# Altium PCB T-Type Converter.PcbDoc (part 3 of 4)
Units mil, origin at the board's own origin, x right, y up, seen from the top; angles counter-clockwise.
Board outline 14649.61 x 8960.63 mil, 2 copper layers (Top Layer, Bottom Layer), stack 64.8 mil thick; 214 components, 130 nets, 860 pads, 57 vias.
Unrouted connection lines stored in the file: 20.
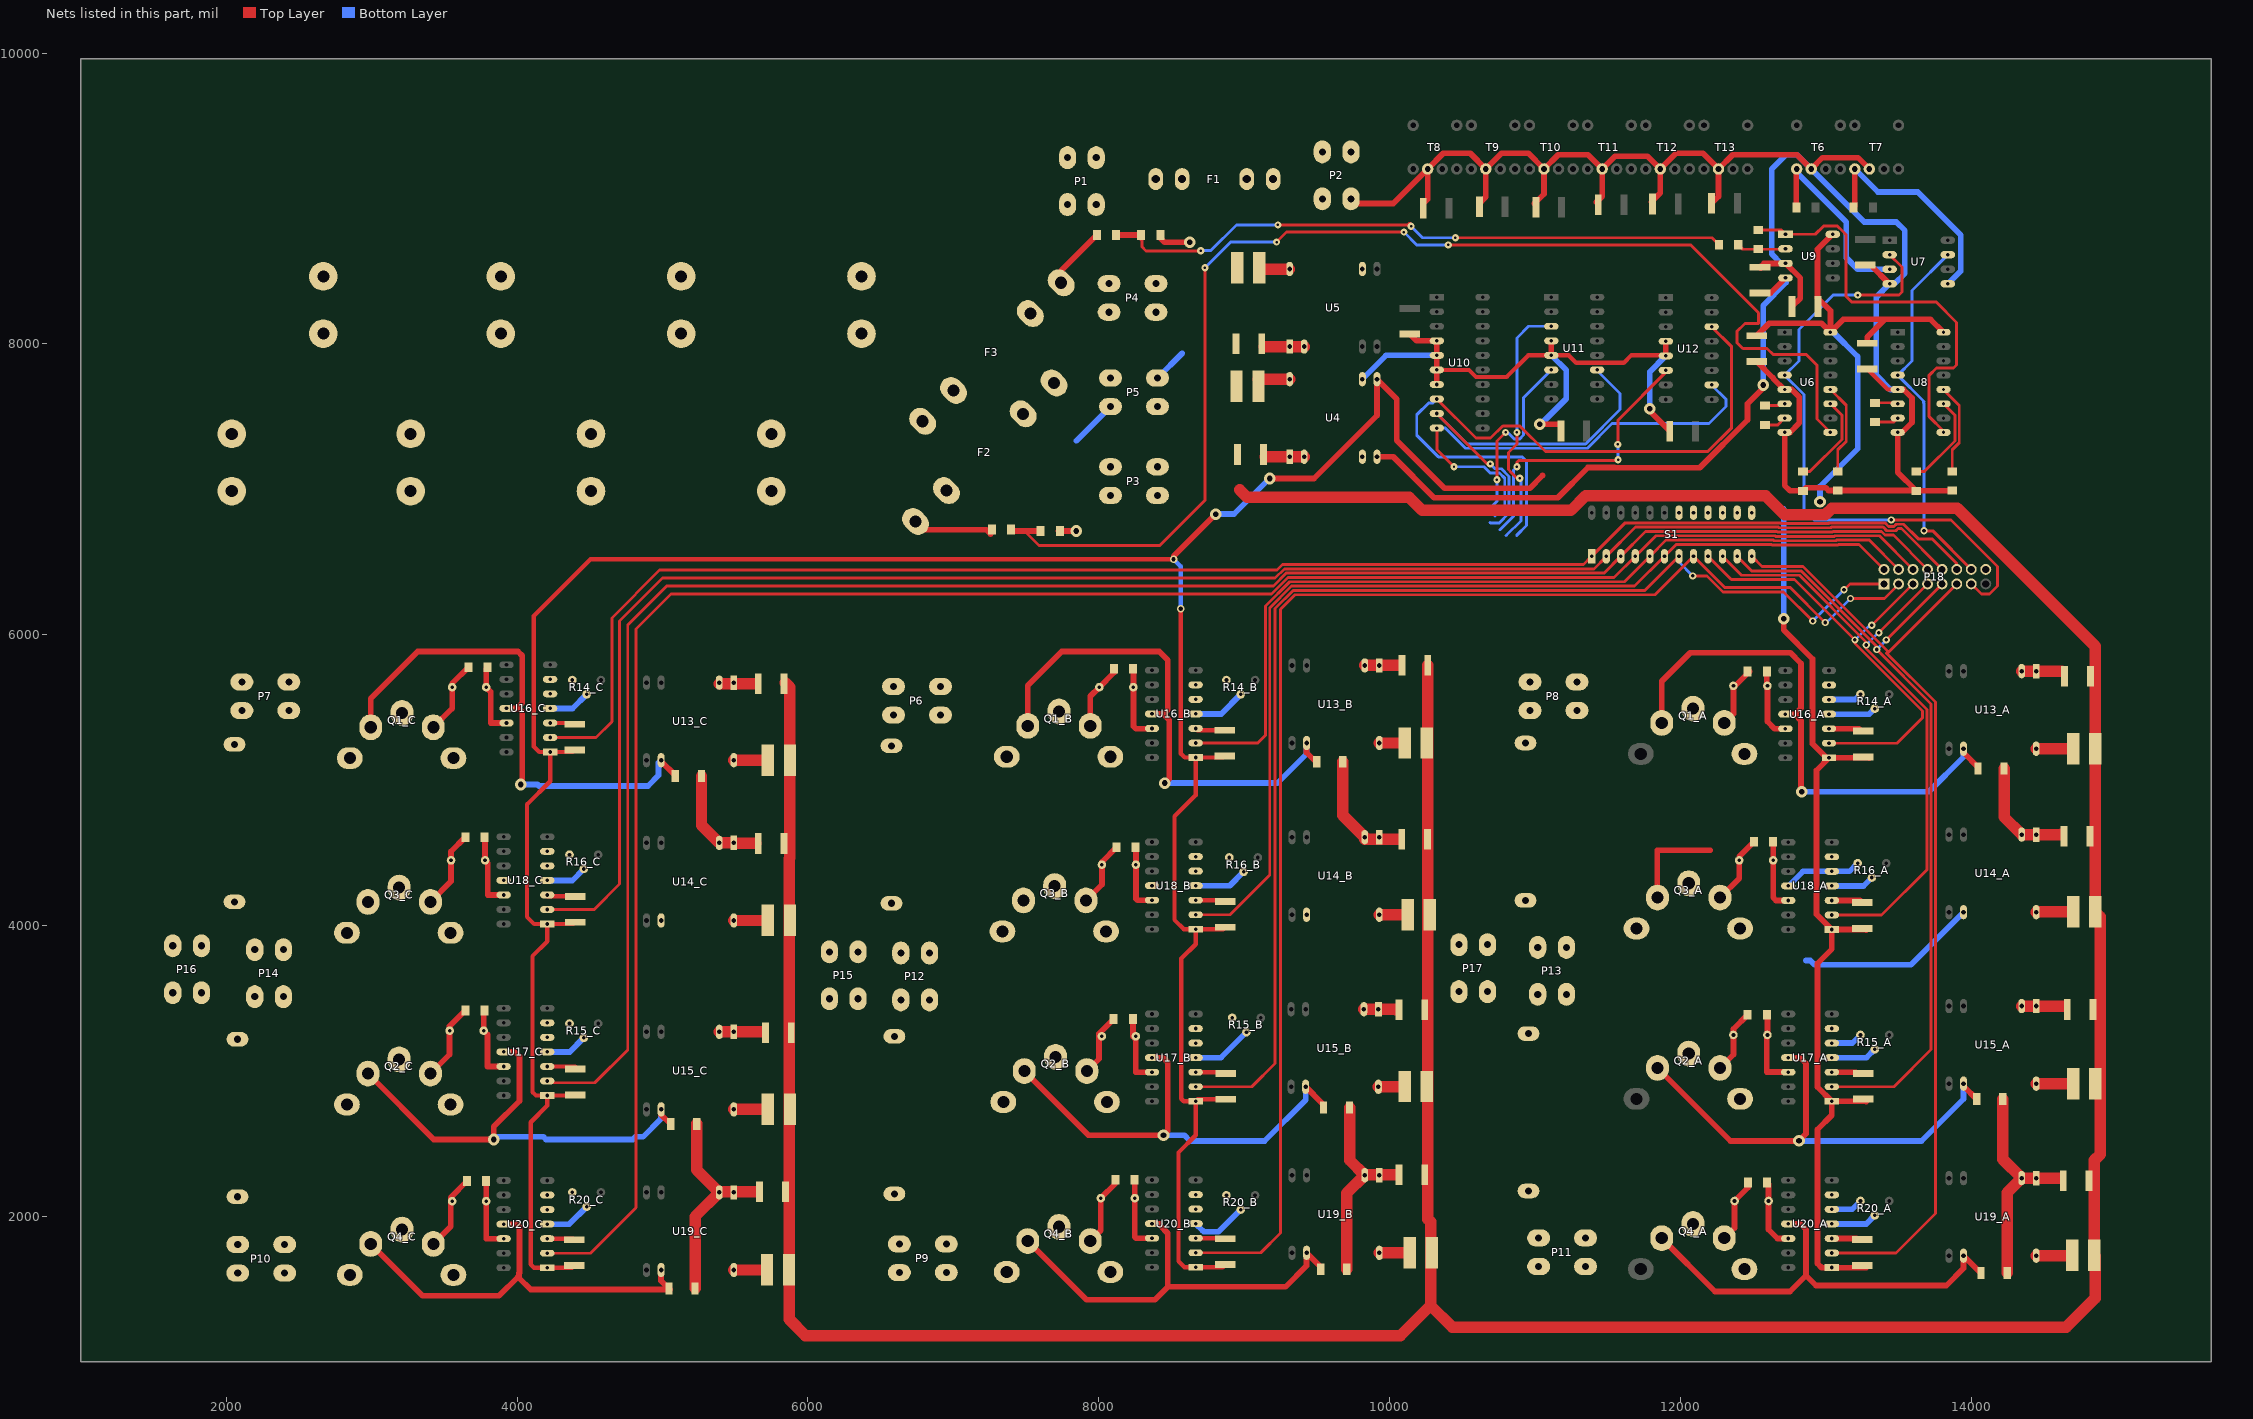
[diagram p2: the nets of this part, all layers, seen from the top]

## Via types
v1: diameter 50, hole 17, Top Layer to Bottom Layer, 25 vias
v2: diameter 80, hole 39, Top Layer to Bottom Layer, 17 vias
v3: diameter 50, hole 25, Top Layer to Bottom Layer, 13 vias
v4: diameter 50, hole 28, Top Layer to Bottom Layer, 2 vias

## Nets (pads, with @x,y where several pads share a name; then routed paths per layer and width w, separated by ;. In a path a pad name is that pad's centre, name@x,y a point inside that pad or via, vN(x,y) a via of type N, cw(c..) or ccw(c..) an arc to the next point about the centre after c; other vN are vias at no path point) (continued)
12V: C11.2 C13.2 C15.2 C33_A.2 C33_B.2 C33_C.2 C34_A.2 C34_B.2 C34_C.2 C35_A.2 C35_B.2 C35_C.2 C39_A.2 C39_B.2 C39_C.2 U4.8 U6.16 U8.16 U9.8 U16_A.1 U16_B.1 U16_C.1 U17_A.1 U17_B.1 U17_C.1 U18_A.1 U18_B.1 U18_C.1 U20_A.1 U20_B.1 U20_C.1 | length 30708
  Top Layer w30: C39_C.2@4392.72,1662.4 4377.56,1647.24 U20_C.1@4207.48,1647.24 4116.54,1647.24 4093.5,1670.28 4093.5,2648.62 4207.48,2762.6 U17_C.1@4207.48,2831.5 ; C35_C.2@4395.67,5207.68 4381.69,5193.7 U16_C.1@4227.17,5193.7 ; C34_C.2@4398.62,2835.63 4394.49,2831.5 U17_C.1@4207.48,2831.5 ; C33_C.2@4398.62,4023.62 4386.02,4011.02 U18_C.1@4207.48,4011.02 ; v4(8514.76,6519.69) 4504.92,6519.69 4114.17,6128.94 4114.17,5232.28 4152.76,5193.7 U16_C.1@4227.17,5193.7 ; v4(8563.98,6178.98) 8563.98,5183.07 8591.14,5155.91 U16_B.1@8666.14,5155.91 ; C35_B.2@8865.16,5166.34 8854.72,5155.91 U16_B.1@8666.14,5155.91 ; C39_B.2@8871.06,1669.29 8852.17,1650.39 U20_B.1@8666.14,1650.39 8589.76,1650.39 8548.46,1691.69 8548.46,2440.2 8666.14,2557.87 U17_B.1@8666.14,2792.13 ; C33_B.2@8871.06,3989.17 8856.69,3974.8 U18_B.1@8666.14,3974.8 ; C34_B.2@8872.05,2806.1 8680.12,2806.1 U17_B.1@8666.14,2792.13 ; U17_C.1@4207.48,2831.5 4130.12,2831.5 4106.3,2855.32 4106.3,3790.35 4207.48,3891.54 U18_C.1@4207.48,4011.02 ; U18_C.1@4207.48,4011.02 4116.93,4011.02 4067.91,4060.04 4067.91,4833.66 4227.17,4992.91 U16_C.1@4227.17,5193.7 ; U17_B.1@8666.14,2792.13 8584.84,2792.13 8567.91,2809.06 8567.91,3773.62 8666.14,3871.85 U18_B.1@8666.14,3974.8 ; U18_B.1@8666.14,3974.8 8585.24,3974.8 8520.67,4039.37 8520.67,4751.97 8666.14,4897.44 U16_B.1@8666.14,5155.91
  Top Layer w39.37: v4(8514.76,6519.69) 8514.76,6539.76 v2(8805,6830) ; v2(9175,7075) 9480,7075 9912.99,7507.99 U4.8@9912.99,7757.87 ; U4.8@9912.99,7757.87 10049.21,7621.66 10049.21,7336.61 10377.95,7007.87 10964.57,7007.87 11052.17,7095.47 ; C11.2@12523.62,8056.1 12610.24,8142.72 12969.49,8142.72 U6.16@13031.5,8080.71 ; v2(12710,6110) 12710,6033.25 12908.66,5834.58 12908.66,5250.79 13005.12,5154.33 U16_A.1@13021.65,5154.33 ; U9.8@13047.44,8754.13 13045.1,8754.13 12942.91,8651.94 12942.91,8316.93 13031.5,8228.35 U6.16@13031.5,8080.71 ; C39_A.2@13278.54,1647.64 12971.46,1647.64 12942.91,1676.18 12942.91,2598.43 13040.36,2695.87 U17_A.1@13040.36,2792.13 ; C33_A.2@13278.54,2789.37 13275.79,2792.13 U17_A.1@13040.36,2792.13 ; C34_A.2@13278.54,3970.47 13275.79,3973.23 U18_A.1@13041.34,3973.23 ; C13.2@13284.45,8004.92 13284.45,8048.23 13405.51,8169.29 ; C35_A.2@13298.23,5151.58 13295.47,5154.33 U16_A.1@13021.65,5154.33 ; U8.16@13809.06,8080.71 13720.47,8169.29 13405.51,8169.29 ; U16_A.1@13021.65,5154.33 12935.04,5067.72 12935.04,4078.55 12993.67,4019.92 12994.65,4019.92 U18_A.1@13041.34,3973.23 ; U6.16@13031.5,8080.71 13120.08,8169.29 13405.51,8169.29 ; U17_A.1@13040.36,2792.13 12942.91,2889.57 12942.91,3740.16 13041.34,3838.58 U18_A.1@13041.34,3973.23
  Bottom Layer w30: v4(8514.76,6519.69) 8563.98,6470.47 v4(8563.98,6178.98)
  Bottom Layer w39.37: v2(8805,6830) 8930,6830 v2(9175,7075) ; v2(12710,6110) 12710,6865 ; v2(12959.65,6914.37) 12959.65,7019.69 13218.5,7278.54 13218.5,7913.39 13051.18,8080.71 U6.16@13031.5,8080.71 ; U17_A.1@13038.19,2792.13 U17_A.1@13041.34,2792.13 ; U18_A.1@13040.36,3973.23 U18_A.1@13041.34,3973.23
48V: C3.2 C10.2 C28_A.2 C28_B.2 C28_C.2 C29_A.2 C29_B.2 C29_C.2 C31_A.2 C31_B.2 C31_C.2 C36_A.2 C36_B.2 C36_C.2 F1.2 L1.1 L2.1 L3_A.1 L3_B.1 L3_C.1 L4_A.1 L4_B.1 L4_C.1 L5_A.1 L5_B.1 L5_C.1 L6_A.1 L6_B.1 L6_C.1 | length 29025.3
  Top Layer w78.74: C28_C.2@5845.47,5670.28 5875.98,5639.76 L3_C.1@5875.98,5137.8 5875.98,4466.54 5871.06,4461.61 5871.06,2736.22 5871.06,1292.32 5982.28,1181.1 10074.8,1181.1 10281.5,1387.8 ; 8968.5,6998.03 9021.65,6944.88 10134.84,6944.88 10224.72,6855 11246.73,6855 11347.44,6955.71 12585.68,6955.71 12716.39,6825 12996.66,6825 13041.66,6870 13903.62,6870 14852.36,5921.26 L3_A.1@14852.36,5216.54 L4_A.1@14852.36,4094.49 14886.81,4060.04 14886.81,2426.18 14846.46,2385.83 L6_A.1@14846.46,1732.28 14851.38,1727.36 14851.38,1437.01 14653.54,1239.17 10430.12,1239.17 10281.5,1387.8 ; C28_B.2@10262.8,5789.37 10262.8,4074.8 10262.8,2287.4 10262.8,1982.28 10281.5,1963.58 10281.5,1387.8
-12V: C17.1 U4.7 U9.4 | length 4160.8
  Top Layer w39.37: U4.7@9912.99,7225.39 U4.7@9912.99,7224.41 10024.82,7224.41 10306.32,6942.91 11156.5,6942.91 11363.58,7150 11547.27,7150 11548.21,7149.06 12133.1,7149.06 12460.63,7476.58 12460.63,7588.58 12568.9,7696.85 v2(12568.9,7717.52) ; C17.1@12547.24,8350.39 12618.7,8350.39 U9.4@12722.44,8454.13
  Bottom Layer w39.37: v2(12568.9,7717.52) 12568.9,8264.57 12726.38,8422.05
GND: *1_A.1@12410.43,2809.06 *1_B.1 *1_C.1 *2_A.1 *2_B.1 *2_C.1 *3_A.1@12439.96,5181.1 *3_B.1 *3_C.1 *4_A.1@12439.96,1637.8 *4_B.1 *4_C.1 C1.2 C2.1 C3.1 C4.2 C5.1 C6.2 C7.1 C8.2 C9.1 C10.1 C11.1 C13.1 C14.1 C15.1 C17.2 C18.1 C19.1 C20.1 C21.1 C22.1 C23.1 C24.1 C25.1 C26.1 C27_A.2 C27_B.2 C27_C.2 C28_A.1 C28_B.1 C28_C.1 C29_A.1 C29_B.1 C29_C.1 C30_A.2 C30_B.2 C30_C.2 C31_A.1 C31_B.1 C31_C.1 C32_A.2 C32_B.2 C32_C.2 C33_A.1 C33_B.1 C33_C.1 C34_A.1 C34_B.1 C34_C.1 C35_A.1 C35_B.1 C35_C.1 C36_A.1 C36_B.1 C36_C.1 C37_A.2 C37_B.2 C37_C.2 C38_A.1 C38_B.1 C38_C.1 C39_A.1 C39_B.1 C39_C.1 P2.1 P2.2 P5.1 P5.2 P12.1 P12.2 P13.1 P13.2 P14.1 P14.2 P18.16 Q3_A.3 Q3_B.3 Q3_C.3 R2.2 R3.1 R7.2 R8.1 R11.2 R12.1 R14_A.1 R14_B.1 R14_C.1 R15_A.1 R15_B.1 R15_C.1 R16_A.1 R16_B.1 R16_C.1 R20_A.1 R20_B.1 R20_C.1 T6.2 T7.2 T8.2 T9.2 T10.2 T11.2 T12.2 T13.2 U4.1 U4.2 U4.6 U4.9 U5.1 U5.2 U5.9 U6.5 U6.8 U7.4 U8.5 U8.8 U9.3 U10.4 U10.5 U10.6 U10.7 U11.4 U11.5 U12.4 U12.5 U13_A.1 U13_A.2 U13_B.1 U13_B.2 U13_C.1 U13_C.2 U14_A.1 U14_A.2 U14_A.9 U14_B.1 U14_B.2 U14_B.9 U14_C.1 U14_C.2 U14_C.9 U15_A.1 U15_A.2 U15_B.1 U15_B.2 U15_C.1 U15_C.2 U16_A.3 U16_A.5 U16_A.6 U16_B.3 U16_B.5 U16_B.6 U16_C.3 U16_C.5 U16_C.6 U17_A.3 U17_A.5 U17_A.6 U17_B.3 U17_B.5 U17_B.6 U17_C.3 U17_C.5 U17_C.6 U18_A.3 U18_A.5 U18_A.6 U18_A.11 U18_B.3 U18_B.5 U18_B.6 U18_B.11 U18_C.3 U18_C.5 U18_C.6 U18_C.11 U19_A.1 U19_A.2 U19_B.1 U19_B.2 U19_C.1 U19_C.2 U20_A.3 U20_A.5 U20_A.6 U20_B.3 U20_B.5 U20_B.6 U20_C.3 U20_C.5 U20_C.6 | length 33166.9
  Top Layer w29.53: U10.6@10324.8,7821.65 10545.75,7821.65 10594.13,7773.27 10804.76,7773.27 10953.15,7921.65 U11.5@11112.2,7921.65 11231.89,7921.65 11283.5,7870.04 11610.2,7870.04 11663.39,7923.23 11894.88,7923.23 U12.5@11899.61,7918.5 ; C13.1@13284.45,7827.76 13425.2,7687.01 U8.5@13494.09,7687.01
  Top Layer w30: U20_C.3@4207.48,1847.24 4385.04,1847.24 C39_C.1@4392.72,1839.57 ; U17_C.3@4207.48,3031.5 4398.62,3031.5 C34_C.1@4398.62,3012.8 ; U18_C.3@4207.48,4211.02 4207.48,4200.79 C33_C.1@4398.62,4200.79 ; U16_C.3@4227.17,5393.7 4395.67,5393.7 C35_C.1@4395.67,5384.84 ; U13_C.2@5390.16,5664.37 U13_C.2@5390.16,5671.26 ; U14_C.1@5490.16,4564.96 U14_C.1@5490.16,4568.9 ; U13_C.1@5490.16,5664.37 U13_C.1@5490.16,5671.26 ; C36_C.1@5687.01,3262.8 C36_C.1@5707.68,3262.8 ; U20_B.3@8666.14,1850.39 8867.13,1850.39 C39_B.1@8871.06,1846.46 ; U17_B.3@8666.14,2992.13 8863.19,2992.13 C34_B.1@8872.05,2983.27 ; U18_B.3@8666.14,4174.8 8862.6,4174.8 C33_B.1@8871.06,4166.34 ; U16_B.3@8666.14,5355.91 8678.54,5343.5 C35_B.1@8865.16,5343.5 ; U19_B.2@9829.13,2283.46 U19_B.2@9829.13,2287.4 ; U14_B.2@9829.13,4594.49 U14_B.2@9829.13,4608.27 ; C36_B.1@10041.34,3422.24 C36_B.1@10064.96,3422.24 ; 10057.09,5789.37 C28_B.1@10085.63,5789.37
  Top Layer w39.37: R2.2@7722.44,6713.58 R2.2@7732.28,6713.58 v2(7845.47,6713.58) ; R3.1@8423.23,8729.33 8452.76,8699.8 v2(8625.98,8699.8) ; U4.1@9312.01,7223.42 U4.1@9312.99,7224.41 ; U5.1@9312.01,7981.3 U5.1@9313.02,7981.33 ; P2.2@9734.25,8998.03 9765.75,8966.54 10024.8,8966.54 T8.2@10261.81,9203.54 ; C19.1@10138.78,8067.91 10185.04,8021.65 U10.4@10324.8,8021.65 U10.6@10324.8,7821.65 U10.7@10324.8,7721.65 ; C18.1@10228.35,8962.6 10261.81,8996.06 T8.2@10261.81,9203.54 ; C20.1@10627.95,8976.38 10661.81,9010.24 T9.2@10661.81,9203.54 ; C22.1@10997.05,8966.54 11061.81,9031.3 T10.2@11061.81,9203.54 ; v2(11031.5,7447.83) C25.1@11174.21,7447.83 ; U11.5@11112.2,7921.65 U11.4@11112.2,8021.65 ; C23.1@11421.26,8974.41 11461.81,9014.96 T11.2@11461.81,9203.54 ; v2(11788.39,7554.13) 11788.39,7538.39 C21.1@11926.18,7400.59 ; C24.1@11799.21,8976.38 11861.81,9038.98 T12.2@11861.81,9203.54 ; Q3_A.3@11842.13,4192.91 11840.55,4194.49 11840.55,4517.72 12204.72,4517.72 ; U12.5@11899.61,7918.5 U12.4@11899.61,8018.5 ; C26.1@12214.57,8966.54 12261.81,9013.78 T13.2@12261.81,9203.54 ; C11.1@12523.62,7878.94 12524.61,7878.94 12637.64,7765.91 12637.64,7763.35 12713.98,7687.01 U6.5@12716.54,7687.01 12765.75,7687.01 12817.51,7635.24 12817.51,7456.29 12752.95,7391.73 U6.8@12716.54,7391.73 12716.54,7027.56 12753.94,6990.16 R8.1@12843.5,6990.16 12863.98,7010.63 13000.32,7010.63 13018.83,6992.13 R7.2@13081.69,6992.13 R12.1@13619.09,6992.13 ; C17.2@12552.76,8522.05 C17.2@12547.24,8527.56 12573.82,8554.13 U9.3@12722.44,8554.13 12724.78,8554.13 12824.8,8454.11 12824.8,8314.96 C15.1@12767.72,8257.87 ; U16_A.3@13021.65,5354.33 C35_A.1@13227.36,5354.33 ; U16_A.5@13021.65,5554.33 U16_A.5@13022.63,5554.33 ; U20_A.3@13041.34,1848.82 C39_A.1@13209.25,1848.82 ; U17_A.3@13041.34,2992.13 C33_A.1@13207.68,2992.13 ; U18_A.5@13041.34,4373.23 U18_A.5@13057.87,4373.23 ; C34_A.1@13207.68,4173.23 U18_A.3@13080.71,4173.23 ; C34_A.1@13250,4158.46 13235.24,4173.23 U18_A.3@13080.71,4173.23 ; T7.2@13299.61,9203.54 13221.65,9281.5 12977.56,9281.5 T6.2@12899.61,9203.54 12801.97,9301.18 12359.45,9301.18 T13.2@12261.81,9203.54 ; C14.1@13307.39,8542.63 13436.25,8413.78 U7.4@13438.58,8413.78 ; U8.5@13494.09,7687.01 13533.46,7687.01 13592.52,7627.95 13592.52,7460.63 13523.62,7391.73 U8.8@13494.09,7391.73 13494.09,7117.13 R12.1@13619.09,6992.13 ; R11.2@13869.09,6992.13 13867.13,6990.16 R12.1@13621.06,6990.16 R12.1@13619.09,6992.13 ; T8.2@10261.81,9203.54 10369.29,9311.02 10554.33,9311.02 T9.2@10661.81,9203.54 ; T9.2@10661.81,9203.54 10769.29,9311.02 10954.33,9311.02 T10.2@11061.81,9203.54 ; T10.2@11061.81,9203.54 11159.45,9301.18 11364.17,9301.18 T11.2@11461.81,9203.54 ; T11.2@11461.81,9203.54 11549.61,9291.34 11774.02,9291.34 T12.2@11861.81,9203.54 ; T12.2@11861.81,9203.54 11969.29,9311.02 12155.51,9311.02 12261.81,9204.72 T13.2@12261.81,9203.54 ; U18_A.3@13080.71,4173.23 U18_A.3@13041.34,4173.23 U18_A.3@13080.71,4173.23 ; U5.1@9312.99,7982.28 9347.44,7982.28 U5.1@9312.99,7982.28
  Top Layer w78.74: C37_C.2@5223.86,1505.91 5223.86,1999.06 U19_C.2@5390.16,2165.35 5235.67,2319.84 C32_C.2@5235.67,2636.81 ; C30_C.2@5268.15,5028.54 5268.15,4690.91 U14_C.2@5390.16,4568.9 U14_C.1@5490.16,4568.9 ; U19_C.2@5390.16,2169.29 C31_C.1@5644.69,2169.29 ; U15_C.2@5390.16,3269.68 U15_C.1@5490.16,3269.68 5680.12,3269.68 ; U13_C.2@5390.16,5664.37 U13_C.1@5490.16,5664.37 ; U14_C.1@5490.16,4564.96 C29_C.1@5639.76,4564.96 ; U13_C.1@5490.16,5671.26 5497.05,5664.37 5633.86,5664.37 ; C10.1@9137.79,7982.28 U5.1@9312.99,7982.28 ; C3.1@9144.68,7223.42 U4.1@9312.01,7223.42 ; U4.1@9312.99,7224.41 U4.2@9412.99,7224.41 ; U5.1@9313.02,7981.33 9347.44,7982.28 U5.2@9412.99,7982.28 ; C30_B.2@9678.58,5126.97 9678.58,4758.82 U14_B.2@9829.13,4608.27 ; C37_B.2@9706.14,1636.81 9706.14,2160.47 U19_B.2@9829.13,2283.46 9724.84,2387.76 C32_B.2@9724.84,2749.02 ; U15_B.2@9822.83,3425.2 U15_B.1@9922.83,3425.2 10038.39,3425.2 C36_B.1@10041.34,3422.24 ; U19_B.2@9829.13,2287.4 C31_B.1@10045.28,2287.4 ; U14_B.2@9829.13,4594.49 C29_B.1@10062.99,4594.49 ; U13_B.2@9829.13,5789.37 U13_B.1@9929.13,5789.37 10057.09,5789.37 ; C32_A.2@14216.97,2807.09 14216.97,2393.66 U19_A.2@14346.85,2263.78 ; C30_A.2@14225.83,5080.71 14225.83,4747.01 U14_A.2@14346.85,4625.98 14619.09,4625.98 C29_A.1@14620.08,4626.97 ; C37_A.2@14247.48,1612.2 14247.48,2164.41 U19_A.2@14346.85,2263.78 ; U15_A.2@14346.85,3446.85 C36_A.1@14638.78,3446.85 ; U13_A.2@14346.85,5750 C28_A.1@14623.03,5750 ; 14608.27,2263.78 U19_A.2@14346.85,2263.78
  Bottom Layer w29.53: U6.5@12716.54,7687.01 U6.5@12756.89,7687.01
  Bottom Layer w39.37: 7845.47,7333.66 P5.1@8080.71,7568.9 ; P5.2@8403.54,7765.75 8573.82,7936.02 ; U4.9@9812.99,7757.87 9812.99,7758.85 9975.79,7921.65 U10.5@10324.8,7921.65 ; v2(11031.5,7447.83) 11039.36,7447.83 11214.57,7623.04 11214.57,7820.27 11113.18,7921.65 U11.5@11112.2,7921.65 ; v2(11788.39,7554.13) 11788.39,7808.26 11898.63,7918.5 U12.5@11899.61,7918.5 ; U9.3@12722.44,8554.13 12691.95,8554.13 12627.95,8618.14 12627.95,9202.76 12726.38,9301.18 12801.97,9301.18 T6.2@12899.61,9203.54 13264.57,8838.58 13484.25,8838.58 13543.31,8779.53 13543.31,8484.25 13472.83,8413.78 U7.4@13438.58,8413.78 13346.46,8321.65 13346.46,7785.43 13444.88,7687.01 U8.5@13494.09,7687.01 ; U18_A.11@12741.34,4273.23 12742.32,4273.23 12842.32,4373.23 13162.6,4373.23 R16_A.1@13218.5,4429.13 ; 12864.17,3759.84 12891.73,3759.84 12892.72,3760.83 12923.23,3730.32 13585.62,3730.32 13946.85,4091.54 U14_A.9@13946.85,4092.52 ; U16_A.5@13021.65,5554.33 13201.97,5554.33 R14_A.1@13238.19,5590.55 ; U20_A.5@13041.34,2048.82 13180.71,2048.82 R20_A.1@13238.19,2106.3 ; U17_A.5@13041.34,3192.13 13182.28,3192.13 R15_A.1@13238.19,3248.03
NetC1_1: C1.1 C4.1 C6.1 C8.1 F2.2 R1.1 | length 585.2
  Top Layer w39.37: F2.2@6717,6805.58 6800.15,6722.44 7227.36,6722.44 R1.1@7255.91,6693.9
NetC2_2: C2.2 C5.2 C7.2 C9.2 F3.1 R4.2 | length 429.5
  Top Layer w39.37: F3.1@7741.66,8420.79 7741.66,8504.45 R4.2@7986.22,8749.02
NetC12_1: C12.1 U6.6 | length 140.1
  Top Layer w19.68: C12.1@12581.69,7575.79 12703.74,7575.79 U6.6@12716.54,7588.58
NetC12_2: C12.2 U6.7 | length 154
  Top Layer w19.68: C12.2@12581.69,7443.9 12670.28,7443.9 U6.7@12716.54,7490.16
NetC16_1: C16.1 U8.6 | length 159.3
  Top Layer w19.68: C16.1@13337.6,7595.47 13487.2,7595.47 U8.6@13494.09,7588.58
NetC16_2: C16.2 U8.7 | length 167.5
  Top Layer w19.68: C16.2@13337.6,7463.58 13467.52,7463.58 U8.7@13494.09,7490.16
NetC27_A_1: C27_A.1 P8.1 P8.2 Q1_A.2
NetC27_B_1: C27_B.1 P6.1 P6.2 Q1_B.2
NetC27_C_1: C27_C.1 P7.1 P7.2 Q1_C.2
NetC30_A_1: C30_A.1 C32_A.1 P17.1 P17.2 Q1_A.3 Q2_A.3 Q4_A.2 U13_A.9 U15_A.9 U16_A.11 U17_A.11 | length 7151.5
  Top Layer w39.37: Q2_A.3@11842.13,3021.65 12344.09,2519.68 v2(12814.96,2519.68) 12864.17,2568.9 12864.17,3051.18 12823.23,3092.13 U17_A.11@12741.34,3092.13 ; Q1_A.3@11871.65,5393.7 11871.65,5680.71 12066.93,5875.98 12755.91,5875.98 12829.92,5801.97 12829.92,5497.24 12787.01,5454.33 12783.86,5454.33 ; U16_A.11@12721.65,5454.33 12783.86,5454.33 ; v2(12834.65,4921.26) 12829.92,4925.98 12829.92,5408.27 12783.86,5454.33 ; U15_A.9@13946.85,2913.39 13946.85,2896.66 C32_A.1@14037.4,2806.1 ; U13_A.9@13946.85,5216.54 13946.85,5189.96 C30_A.1@14047.24,5089.57
  Bottom Layer w39.37: v2(12814.96,2519.68) 13658.46,2519.68 13946.85,2808.07 U15_A.9@13946.85,2913.39 ; v2(12834.65,4921.26) 13707.68,4921.26 13946.85,5160.43 U13_A.9@13946.85,5216.54
NetC30_B_1: C30_B.1 C32_B.1 P15.1 P15.2 Q1_B.3 Q2_B.3 Q4_B.2 U13_B.9 U15_B.9 U16_B.11 U17_B.11 | length 6784.4
  Top Layer w39.37: Q2_B.3@7487.89,2999.56 7928.39,2559.06 v2(8444.88,2559.06) 8474.41,2588.58 8474.41,3061.02 8443.31,3092.13 U17_B.11@8366.14,3092.13 ; Q1_B.3@7511.42,5374.02 7511.42,5651.18 7746.06,5885.83 8415.35,5885.83 8474.41,5826.77 8474.41,5482.28 8448.03,5455.91 8441.73,5455.91 ; U16_B.11@8366.14,5455.91 8441.73,5455.91 ; v2(8454.72,4980.31) 8484.25,5009.84 8484.25,5413.39 8441.73,5455.91 ; U15_B.9@9422.83,2891.73 9539.37,2775.2 C32_B.1@9539.37,2747.05 ; U13_B.9@9429.13,5255.91 9429.13,5189.96 C30_B.1@9490.16,5128.94
  Bottom Layer w39.37: v2(8444.88,2559.06) 8588.84,2559.06 8628.2,2519.69 9140.75,2519.69 9422.83,2801.77 U15_B.9@9422.83,2891.73 ; v2(8454.72,4980.31) 9228.35,4980.31 9429.13,5181.1 U13_B.9@9429.13,5255.91
NetC30_C_1: C30_C.1 C32_C.1 P16.1 P16.2 Q1_C.3 Q2_C.3 Q4_C.2 U13_C.9 U15_C.9 U16_C.11 U17_C.11 | length 6876.7
  Top Layer w39.37: Q2_C.3@2974.02,2982.28 3426.77,2529.53 v2(3838.58,2529.53) 3838.58,2617.13 4015.75,2794.29 4015.75,3100.39 3984.65,3131.5 U17_C.11@3907.48,3131.5 ; Q1_C.3@2993.7,5364.17 2993.7,5562.6 3316.93,5885.83 4005.91,5885.83 4035.43,5856.3 4035.43,5531.5 3997.64,5493.7 ; U16_C.11@3927.17,5493.7 3997.64,5493.7 ; v2(4025.59,4970.47) 4035.43,4980.31 4035.43,5472.44 4014.17,5493.7 3997.64,5493.7 ; U15_C.9@4990.16,2736.22 4990.16,2699.8 C32_C.1@5051.18,2638.78 ; U13_C.9@4990.16,5137.8 4990.16,5130.91 C30_C.1@5090.55,5030.51
  Bottom Layer w39.37: v2(3838.58,2529.53) 3856.3,2547.24 4181.36,2547.24 4199.07,2529.53 4794.82,2529.53 4812.53,2547.24 4865.16,2547.24 4990.16,2672.24 U15_C.9@4990.16,2736.22 ; v2@4037.4,4958.66 v2(4025.59,4970.47) 4140.02,4970.47 4149.86,4960.63 4899.83,4960.63 4972.83,5033.64 4972.83,5120.47 U13_C.9@4990.16,5137.8 U13_C.9@4990.16,5136.82
NetC37_A_1: C37_A.1 C38_A.2 P11.1 P11.2 Q4_A.3 U19_A.9 U20_A.11 | length 3053.6
  Top Layer w39.37: Q4_A.3@11871.65,1850.39 12237.8,1484.25 12753.94,1484.25 12864.17,1594.49 ; U20_A.11@12741.34,1948.82 12824.8,1948.82 12864.17,1909.45 12864.17,1594.49 ; C37_A.1@14062.01,1615.16 U19_A.9@13946.85,1730.32 13946.85,1643.7 13828.74,1525.59 12933.07,1525.59 12864.17,1594.49
NetC37_B_1: C37_B.1 C38_B.2 P9.1 P9.2 Q4_B.3 U19_B.9 U20_B.11 | length 2950.8
  Top Layer w39.37: Q4_B.3@7511.42,1830.71 7914.96,1427.17 8385.83,1427.17 8474.41,1515.75 ; U20_B.11@8366.14,1950.39 8423.62,1950.39 8423.62,1935.43 8474.41,1884.64 8474.41,1816.15 8474.41,1784.64 8474.41,1716.15 8474.41,1684.64 8474.41,1515.75 ; C37_B.1@9529.53,1625 9529.53,1649.61 U19_B.9@9429.13,1750 9429.13,1660.43 9284.45,1515.75 8474.41,1515.75
NetC37_C_1: C37_C.1 C38_C.2 P10.1 P10.2 Q4_C.3 U19_C.9 U20_C.11 | length 2913.1
  Top Layer w39.37: Q4_C.3@2993.7,1811.02 3350,1454.72 3875.98,1454.72 4005.91,1584.65 ; U20_C.11@3907.48,1947.24 3997.64,1947.24 4015.75,1929.13 4015.75,1613 4013.78,1611.03 4013.78,1576.77 4093.5,1497.05 5051.18,1497.05 4990.16,1558.07 U19_C.9@4990.16,1631.89
NetD1_A_1: D1_A.1 R13_A.1 U16_A.12 | length 491.8
  Top Layer w39.37: D1_A.1@12586.61,5648.62 12594.49,5656.5 R13_A.1@12594.49,5747.05 R13_A.1@12595.47,5748.03 ; D1_A.1@12598.43,5648.62 12598.43,5403.54 12647.64,5354.33 U16_A.12@12721.65,5354.33
NetD1_A_2: D1_A.2 Q1_A.1 R13_A.2 | length 426.3
  Top Layer w39.37: Q1_A.1@12301.57,5393.7 12364.57,5456.69 12364.57,5637.2 R13_A.2@12474.41,5747.05 ; Q1_A.1@12335.63,5354.33 Q1_A.1@12336.61,5353.35
NetD1_B_1: D1_B.1 R13_B.1 U16_B.12 | length 532.8
  Top Layer w39.37: R13_B.1@8236.22,5766.73 8238.19,5764.77 D1_B.1@8238.19,5639.76 8238.19,5371.07 8255.91,5353.35 8363.58,5353.35 U16_B.12@8366.14,5355.91
NetD1_B_2: D1_B.2 Q1_B.1 R13_B.2 | length 460.2
  Top Layer w39.37: Q1_B.1@7941.34,5374.02 7941.34,5576.77 D1_B.2@8004.33,5639.76 8104.33,5739.76 R13_B.2@8104.33,5766.73
NetD1_C_1: D1_C.1 R13_C.1 U16_C.12 | length 510.6
  Top Layer w39.37: R13_C.1@3798.23,5777.56 R13_C.1@3797.25,5776.57 3787.01,5766.34 D1_C.1@3787.01,5639.76 3817.91,5608.86 3817.91,5393.7 U16_C.12@3927.17,5393.7
NetD1_C_2: D1_C.2 Q1_C.1 R13_C.2 | length 512.5
  Top Layer w39.37: Q1_C.1@3423.62,5364.17 3553.15,5493.7 D1_C.2@3553.15,5639.76 3553.15,5664.37 R13_C.2@3665.36,5776.57
NetD2_A_1: D2_A.1 R17_A.2 U17_A.12 | length 544.2
  Top Layer w39.37: R17_A.2@12594.49,3386.81 12598.43,3382.88 D2_A.1@12598.43,3248.03 12594.49,3244.1 12594.49,2993.11 12740.35,2993.11 U17_A.12@12741.34,2992.13
NetD2_A_2: D2_A.2 Q2_A.1 R17_A.1 | length 444.1
  Top Layer w39.37: Q2_A.1@12272.05,3021.65 12364.57,3114.17 D2_A.2@12364.57,3248.03 12364.57,3288.78 R17_A.1@12462.6,3386.81
NetD2_B_1: D2_B.1 R17_B.2 U17_B.12 | length 484.9
  Top Layer w39.37: R17_B.2@8234.25,3357.28 8235.83,3355.71 8235.83,3238.19 8254.92,3219.09 8254.92,2992.13 U17_B.12@8366.14,2992.13
NetD2_B_2: D2_B.2 Q2_B.1 R17_B.1 | length 434.2
  Top Layer w39.37: Q2_B.1@7917.81,2999.56 8001.97,3083.72 8001.97,3256.89 R17_B.1@8102.36,3357.28
NetD2_C_1: D2_C.1 R17_C.2 U17_C.12 | length 510.9
  Top Layer w39.37: R17_C.2@3776.57,3415.35 R17_C.2@3775.59,3416.34 3769.68,3410.43 D2_C.1@3769.68,3277.56 3796.26,3250.98 3796.26,3031.5 U17_C.12@3907.48,3031.5
NetD2_C_2: D2_C.2 Q2_C.1 R17_C.1 | length 533.4
  Top Layer w39.37: Q2_C.1@3403.94,2982.28 3535.83,3114.17 D2_C.2@3535.83,3277.56 3535.83,3308.47 R17_C.1@3643.7,3416.34
NetD3_A_1: D3_A.1 R18_A.2 U18_A.12 | length 495.6
  Top Layer w39.37: R18_A.2@12637.8,4576.77 D3_A.1@12637.8,4448.82 12637.8,4192.91 12657.48,4173.23 U18_A.12@12741.34,4173.23
NetD3_A_2: D3_A.2 Q3_A.1 R18_A.1 | length 454.7
  Top Layer w39.37: Q3_A.1@12272.05,4192.91 12403.94,4324.8 D3_A.2@12403.94,4448.82 ; D3_A.2@12403.94,4474.8 R18_A.1@12505.91,4576.77
NetD3_B_1: D3_B.1 R18_B.2 U18_B.12 | length 469.5
  Top Layer w39.37: R18_B.2@8254.53,4538.98 R18_B.2@8253.94,4538.39 8255.51,4536.81 D3_B.1@8255.51,4419.29 8255.51,4185.43 8266.14,4174.8 U18_B.12@8366.14,4174.8
NetD3_B_2: D3_B.2 Q3_B.1 R18_B.1 | length 452.2
  Top Layer w39.37: Q3_B.1@7911.81,4173.23 8021.65,4283.07 D3_B.2@8021.65,4419.29 8021.65,4437.99 R18_B.1@8122.05,4538.39
NetD3_C_1: D3_C.1 R18_C.2 U18_C.12 | length 520.7
  Top Layer w39.37: R18_C.2@3779.53,4611.22 R18_C.2@3775.59,4607.28 3779.53,4603.35 D3_C.1@3779.53,4448.82 3797.83,4430.51 3797.83,4211.02 U18_C.12@3907.48,4211.02
NetD3_C_2: D3_C.2 Q3_C.1 R18_C.1 | length 543.2
  Top Layer w39.37: Q3_C.1@3403.94,4163.39 3545.67,4305.12 D3_C.2@3545.67,4448.82 3545.67,4509.25 R18_C.1@3643.7,4607.28
NetD4_A_1: D4_A.1 R19_A.1 U20_A.12 | length 487.5
  Top Layer w39.37: R19_A.1@12596.46,2233.27 12605.91,2223.82 D4_A.1@12605.91,2106.3 12605.91,1910.83 12667.91,1848.82 U20_A.12@12741.34,1848.82
NetD4_A_2: D4_A.2 Q4_A.1 R19_A.2 | length 450.4
  Top Layer w39.37: Q4_A.1@12301.57,1850.39 12372.05,1920.87 D4_A.2@12372.05,2106.3 12464.57,2198.82 R19_A.2@12464.57,2233.27
NetD4_B_1: D4_B.1 R19_B.1 U20_B.12 | length 517.7
  Top Layer w39.37: R19_B.1@8247.05,2253.94 R19_B.1@8246.06,2252.95 8248.03,2250.99 D4_B.1@8248.03,2125.98 8248.03,1859.25 8256.89,1850.39 U20_B.12@8366.14,1850.39
NetD4_B_2: D4_B.2 Q4_B.1 R19_B.2 | length 493.8
  Top Layer w39.37: Q4_B.1@7941.34,1830.71 8014.17,1903.54 D4_B.2@8014.17,2125.98 8114.17,2225.99 R19_B.2@8114.17,2252.95
NetD4_C_1: D4_C.1 R19_C.1 U20_C.12 | length 519
  Top Layer w39.37: R19_C.1@3789.57,2240.94 R19_C.1@3787.4,2243.11 3787.4,1847.24 U20_C.12@3907.48,1847.24
NetD4_C_2: D4_C.2 Q4_C.1 R19_C.2 | length 528.1
  Top Layer w39.37: Q4_C.1@3423.62,1811.02 3543.31,1930.71 3543.31,2130.91 R19_C.2@3655.51,2243.11
NetF1_1: F1.1 P1.1 P1.2
NetF2_1: F2.1 P4.1 P4.2
NetF3_2: F3.2 P3.1 P3.2
NetL1_2: L1.2 U4.14 | length 216.5
  Top Layer w78.74: L1.2@9096.46,7757.88 U4.14@9312.99,7757.87
NetL2_2: L2.2 U5.14 | length 203.6
  Top Layer w39.37: U5.14@9311.02,8513.78 U5.14@9312.99,8515.75
  Top Layer w78.74: L2.2@9110.24,8513.78 U5.14@9311.02,8513.78
NetL3_A_2: L3_A.2 U13_A.14 | length 253.9
  Top Layer w78.74: U13_A.14@14446.85,5216.54 L3_A.2@14700.79,5216.54
NetL3_B_2: L3_B.2 U13_B.14 | length 175.2
  Top Layer w78.74: U13_B.14@9929.13,5255.91 L3_B.2@10104.33,5255.91
NetL3_C_2: L3_C.2 U13_C.14 | length 234.3
  Top Layer w78.74: U13_C.14@5490.16,5137.8 L3_C.2@5724.41,5137.8
NetL4_A_2: L4_A.2 U14_A.14 | length 254.8
  Top Layer w78.74: U14_A.14@14446.85,4092.52 14448.82,4094.49 L4_A.2@14700.79,4094.49
NetL4_B_2: L4_B.2 U14_B.14 | length 194.9
  Top Layer w78.74: U14_B.14@9929.13,4074.8 L4_B.2@10124.02,4074.8
NetL4_C_2: L4_C.2 U14_C.14 | length 234.3
  Top Layer w78.74: U14_C.14@5490.16,4035.43 L4_C.2@5724.41,4035.43
NetL5_A_2: L5_A.2 U15_A.14 | length 253.9
  Top Layer w78.74: U15_A.14@14446.85,2913.39 L5_A.2@14700.79,2913.39
NetL5_B_2: L5_B.2 U15_B.14 | length 182.3
  Top Layer w78.74: U15_B.14@9922.83,2891.73 10102.36,2891.73 L5_B.2@10104.33,2893.7
NetL5_C_2: L5_C.2 U15_C.14 | length 234.3
  Top Layer w78.74: U15_C.14@5490.16,2736.22 L5_C.2@5724.41,2736.22
NetL6_A_2: L6_A.2 U19_A.14 | length 248.8
  Top Layer w78.74: U19_A.14@14446.85,1730.32 14692.91,1730.32 L6_A.2@14694.88,1732.28
NetL6_B_2: L6_B.2 U19_B.14 | length 209.5
  Top Layer w78.74: U19_B.14@9929.13,1750 10135.83,1750 L6_B.2@10137.8,1751.97
NetL6_C_2: L6_C.2 U19_C.14 | length 229.2
  Top Layer w78.74: U19_C.14@5490.16,1631.89 5716.54,1631.89 L6_C.2@5718.5,1633.86
NetP18_1: P18.1 S1.7 U17_B.2 | length 8390.4
  Top Layer w19.68: U17_B.2@8666.14,2892.13 9052.56,2892.13 9212.6,3052.17 9212.6,6179.78 9337.82,6305 11755,6305 S1.7@11990,6540 ; v3(12085,6405) 12183.02,6405 12292.7,6295.31 12709.68,6295.31 v3(12910,6095) ; v3(13125,6310) 13165,6350 P18.1@13400,6350
  Bottom Layer w19.68: S1.7@11990,6540 11990,6500 v3(12085,6405) ; v3(12910,6095) v3(13125,6310)
NetP18_2: P18.2 S1.8 U20_B.2 | length 9629.9
  Top Layer w19.68: U20_B.2@8666.14,1750.39 9113.58,1750.39 9250,1886.81 9250,6175.2 9349.8,6275 11825,6275 S1.8@12090,6540 12305,6325 12755,6325 v3(12995,6085) ; v3(13170,6250) 13403.06,6250 13500,6346.94 P18.2@13500,6350
  Bottom Layer w19.68: v3(12995,6085) 13005,6085 v3(13170,6250)
NetP18_3: P18.3 S1.9 U16_A.2 | length 3251.4
  Top Layer w19.68: S1.9@12190,6540 12350,6380 12785,6380 v3(13200,5965) 13200,5940 13664.88,5475.12 13664.88,5429.65 13489.57,5254.33 U16_A.2@13021.65,5254.33 ; v3(13315,6065) P18.3@13600,6350
  Bottom Layer w19.68: v3(13200,5965) 13300,6065 v3(13315,6065)
NetP18_4: P18.4 S1.10 U18_A.2 | length 4349.8
  Top Layer w19.68: S1.10@12290,6540 12420.32,6409.69 12818.73,6409.69 13276.98,5951.44 v3(13276.98,5930) 13276.98,5905 13694.57,5487.41 13694.57,4384.53 13383.27,4073.23 U18_A.2@13041.34,4073.23 ; v3(13365,6015) P18.4@13700,6350
  Bottom Layer w19.68: v3(13276.98,5930) 13361.98,6015 v3(13365,6015)
NetP18_5: P18.5 S1.11 U17_A.2 | length 5570.7
  Top Layer w19.68: S1.11@12390,6540 12490.63,6439.37 12831.03,6439.37 13350,5920.4 v3(13350,5898.96) 13724.25,5524.71 13724.25,3147.48 13468.9,2892.13 U17_A.2@13041.34,2892.13 ; v3(13415,5965) P18.5@13800,6350
  Bottom Layer w19.68: v3(13350,5898.96) 13415,5963.96 v3(13415,5965)
NetP18_6: P18.6 S1.12 U20_A.2 | length 6710.2
  Top Layer w19.68: S1.12@12490,6540 12560.94,6469.06 12843.32,6469.06 13422.97,5889.41 13422.97,5872.97 P18.6@13900,6350 ; U20_A.2@13041.34,1748.82 13482.09,1748.82 13753.94,2020.67 13753.94,5537.01 13417.97,5872.97
NetP18_7: P18.7 U6.4 U7.2 | length 4302.1
  Top Layer w19.68: v1(13218.5,8336.61) 13503.94,8336.61 13523.62,8356.3 13523.62,8528.74 U7.2@13438.58,8613.78 ; v3(13450,6790) 13860,6790 14180,6470 14180,6335 14125,6280 14070,6280 P18.7@14000,6350
  Bottom Layer w19.68: v1(13218.5,8336.61) 13051.18,8336.61 12814.96,8100.39 12814.96,7883.86 U6.4@12716.54,7785.43 12850,7651.97 12850,6860 12920,6790 v3(13450,6790)
NetP18_9: P18.9 S1.6 U18_B.2 | length 6939.1
  Top Layer w19.68: U18_B.2@8666.14,4074.8 8902.08,4074.8 9176.18,4348.91 9176.18,6185.34 9325.53,6334.69 11684.68,6334.69 S1.6@11890,6540 11971.58,6621.57 12626.17,6621.57 12630.38,6617.36 13082.67,6617.36 13086.88,6621.57 13228.42,6621.57 P18.9@13400,6450
NetP18_10: P18.10 S1.5 U16_B.2 | length 6019.3
  Top Layer w19.68: U16_B.2@8666.14,5255.91 9093.5,5255.91 9146.5,5308.9 9146.5,6197.64 9313.23,6364.37 11614.37,6364.37 S1.5@11790,6540 11901.26,6651.26 12638.47,6651.26 12642.68,6647.05 13070.37,6647.05 13074.59,6651.26 13298.74,6651.26 P18.10@13500,6450
NetP18_11: P18.11 S1.4 U20_C.2 | length 13866.3
  Top Layer w19.68: U20_C.2@4207.48,1747.24 4504.13,1747.24 4817.32,2060.43 4817.32,6039.76 5058.07,6280.51 9187.39,6280.51 9300.93,6394.06 11544.06,6394.06 S1.4@11690,6540 11830.94,6680.94 12650.76,6680.94 12654.97,6676.73 13058.08,6676.73 13062.29,6680.94 13369.06,6680.94 P18.11@13600,6450
NetP18_12: P18.12 S1.3 U17_C.2 | length 12891.3
  Top Layer w19.68: U17_C.2@4207.48,2931.5 4219.69,2919.29 4534.45,2919.29 4760.83,3145.67 4760.83,6067.91 5029.53,6336.61 9201.51,6336.61 9288.64,6423.74 11473.74,6423.74 S1.3@11590,6540 11760.63,6710.63 12663.06,6710.63 12667.27,6706.42 13045.78,6706.42 13050,6710.63 13381.99,6710.63 13406.83,6685.79 13464.21,6685.79 P18.12@13700,6450
NetP18_13: P18.13 S1.2 U18_C.2 | length 11880
  Top Layer w19.68: U18_C.2@4207.48,4111.02 4530.32,4111.02 4704.72,4285.43 4704.72,6095.47 4999.02,6389.76 9212.68,6389.76 9276.34,6453.43 11406.49,6453.43 11490,6536.94 S1.2@11490,6540 11690.32,6740.31 12675.35,6740.31 12679.57,6736.1 13033.49,6736.1 13037.7,6740.31 13394.29,6740.31 13419.13,6715.47 13480.87,6715.47 13496.03,6730.63 13519.37,6730.63 P18.13@13800,6450
NetP18_14: P18.14 S1.1 U16_C.2 | length 10874.4
  Top Layer w19.68: U16_C.2@4227.17,5293.7 4542.72,5293.7 4651.57,5402.56 4651.57,6116.14 4980.31,6444.88 9225.82,6444.88 9264.05,6483.11 11333.11,6483.11 S1.1@11390,6540 11620,6770 12687.65,6770 12691.86,6765.79 13021.19,6765.79 13025.4,6770 13406.58,6770 13431.43,6745.16 13468.57,6745.16 13483.73,6760.31 13534.68,6760.31 13635,6660 13730,6660 13900,6490 P18.14@13900,6450
NetP18_15: P18.15 U7.7 U8.4 | length 2555.3
  Top Layer w19.68: v3(13675,6715) 13735,6715 P18.15@14000,6450
  Bottom Layer w19.68: v3(13675,6715) 13675,7594.53 13670,7599.53 13675,7604.53 U8.4@13494.09,7785.43 13592.52,7883.86 13592.52,8367.72 U7.7@13838.58,8613.78
NetQ2_A_2: Q2_A.2 Q3_A.2
NetQ2_B_2: Q2_B.2 Q3_B.2
NetQ2_C_2: Q2_C.2 Q3_C.2
NetR1_2: R1.2 R2.1 U6.9 | length 8797
  Top Layer w19.68: 7490.16,6713.58 7589.57,6614.17 8419.29,6614.17 8730.32,6925.2 v1(8730.32,8523.62) ; v1(9222.44,8700.79) 9291.34,8769.68 v1(10098.43,8769.68) ; v1(10403.54,8681.1) 12071.29,8681.1 12535,8217.39 12535,8215 12536.42,8213.58 12536.42,8140.75 12442.91,8140.75 12387.8,8085.63 12387.8,8010.83 12429.13,7969.49 12596.46,7969.49 12637.8,7928.15 12865.16,7928.15 12939.96,7853.35 12939.96,7483.27 U6.9@13031.5,7391.73
  Top Layer w39.37: R1.2@7387.8,6713.58 7490.16,6713.58 R2.1@7600.39,6713.58
  Bottom Layer w19.68: v1(8730.32,8523.62) 8907.48,8700.79 v1(9222.44,8700.79) ; v1(10098.43,8769.68) 10187.01,8681.1 v1(10403.54,8681.1)
NetR3_2: R3.2 R4.1 R10.1 | length 4375.7
  Top Layer w19.68: R3.2@8297.24,8743.11 8297.24,8668.17 8325.45,8639.96 8699.02,8639.96 v1(8700.79,8641.73) ; v1(9232.28,8818.9) v1@10137.8,8818.9 ; v1(10452.76,8730.32) 12217.52,8730.32 R10.1@12265.75,8682.09
  Top Layer w39.37: R4.1@8118.11,8749.02 8271.65,8749.02 R3.2@8291.34,8729.33 ; R3.2@8291.34,8749.02 R3.2@8297.24,8743.11 ; v1@10137.8,8818.9 v1(10147.64,8809.06)
  Bottom Layer w19.68: v1(8700.79,8641.73) 8769.69,8641.73 8946.85,8818.9 v1(9232.28,8818.9) ; v1(10147.64,8809.06) 10226.38,8730.32 v1(10452.76,8730.32)
NetR5_1: R5.1 T6.1 U7.3 | length 1349.9
  Top Layer w39.37: R5.1@12797.24,8937.99 12797.24,9201.18 T6.1@12799.61,9203.54
  Bottom Layer w39.37: T6.1@12799.61,9203.54 12799.61,9178.74 13139.76,8838.58 13139.76,8592.52 13218.5,8513.78 U7.3@13438.58,8513.78
NetR6_1: R6.1 T7.1 U7.5 | length 1559.7
  Top Layer w39.37: R6.1@13190.94,8937.99 13199.61,8946.65 T7.1@13199.61,9203.54
  Bottom Layer w39.37: T7.1@13199.61,9203.54 13357.87,9045.28 13631.89,9045.28 13928.15,8749.02 13928.15,8501.01 13840.92,8413.78 U7.5@13838.58,8413.78
NetR7_1: R7.1 U6.12 | length 632
  Top Layer w19.68: U6.12@13031.5,7687.01 13139.92,7578.58 13139.92,7330.22 13081.69,7272 R7.1@13081.69,7124.02
NetR8_2: R8.2 U6.11 | length 636.7
  Top Layer w19.68: R8.2@12843.5,7122.05 12889.76,7122.05 13110.24,7342.52 13110.24,7509.84 U6.11@13031.5,7588.58
NetR9_1: R9.1 R10.2 U9.2 | length 338.5
  Top Layer w19.68: R10.2@12397.64,8682.09 12428.15,8651.57 R9.1@12535.43,8651.57 12719.88,8651.57 U9.2@12722.44,8654.13
NetR9_2: R9.2 U8.9 U9.1 | length 2866.9
  Top Layer w19.68: R9.2@12535.43,8783.46 12693.11,8783.46 U9.1@12722.44,8754.13 12927.36,8754.13 12985.24,8812.01 13077.98,8812.01 13117.28,8772.71 13117.28,8772.48 13139.76,8750 13139.76,8326.77 13179.13,8287.4 13759.84,8287.4 13898.62,8148.62 13898.62,7855.31 13877.95,7834.65 13759.84,7834.65 13710.63,7785.43 13710.63,7500 13809.06,7401.57 U8.9@13809.06,7391.73
NetR11_1: R11.1 U8.12 | length 627.9
  Top Layer w19.68: U8.12@13809.06,7687.01 13809.06,7684.66 13917.48,7576.23 13917.48,7320.38 13869.09,7272 R11.1@13869.09,7124.02
NetR12_2: R12.2 U8.11 | length 642.5
  Top Layer w19.68: R12.2@13621.06,7122.05 13677.17,7122.05 13887.8,7332.68 13887.8,7509.84 U8.11@13809.06,7588.58
NetR14_A_2: R14_A.2 U16_A.4 | length 330.6
  Bottom Layer w39.37: U16_A.4@13021.65,5454.33 13298.82,5454.33 R14_A.2@13336.61,5492.13
NetR14_B_2: R14_B.2 U16_B.4 | length 366
  Bottom Layer w39.37: U16_B.4@8666.14,5455.91 8841.73,5455.91 R14_B.2@8976.38,5590.55
NetR14_C_2: R14_C.2 U16_C.4 | length 291.3
  Bottom Layer w39.37: U16_C.4@4227.17,5493.7 4381.5,5493.7 R14_C.2@4478.35,5590.55
NetR15_A_2: R15_A.2 U17_A.4 | length 319.1
  Bottom Layer w39.37: U17_A.4@13041.34,3092.13 13279.13,3092.13 R15_A.2@13336.61,3149.61
NetR15_B_2: R15_B.2 U17_B.4 | length 422.3
  Bottom Layer w39.37: U17_B.4@8666.14,3092.13 8840.16,3092.13 R15_B.2@9015.75,3267.72
NetR15_C_2: R15_C.2 U17_C.4 | length 291.3
  Bottom Layer w39.37: U17_C.4@4207.48,3131.5 4361.81,3131.5 R15_C.2@4458.66,3228.35
NetR16_A_2: R16_A.2 U18_A.4 | length 299.4
  Bottom Layer w39.37: U18_A.4@13041.34,4273.23 13259.45,4273.23 R16_A.2@13316.93,4330.71
NetR16_B_2: R16_B.2 U18_B.4 | length 369.4
  Bottom Layer w39.37: U18_B.4@8666.14,4274.8 8900.79,4274.8 R16_B.2@8996.06,4370.08
NetR16_C_2: R16_C.2 U18_C.4 | length 283.8
  Bottom Layer w39.37: U18_C.4@4207.48,4311.02 4379.92,4311.02 R16_C.2@4458.66,4389.76
NetR20_A_2: R20_A.2 U20_A.4 | length 319.7
  Bottom Layer w39.37: U20_A.4@13041.34,1948.82 13277.56,1948.82 R20_A.2@13336.61,2007.87
NetR20_B_2: R20_B.2 U20_B.4 | length 396.5
  Bottom Layer w39.37: U20_B.4@8666.14,1950.39 8712.84,1903.7 8713.81,1903.7 8722.83,1894.68 8823.82,1894.68 R20_B.2@8976.38,2047.24
NetR20_C_2: R20_C.2 U20_C.4 | length 320.4
  Bottom Layer w39.37: U20_C.4@4207.48,1947.24 4358.66,1947.24 R20_C.2@4478.35,2066.93
NetS1_13: S1.13 U11.6 | length 1256.7
  Top Layer w19.68: 10738.17,7332.66 v1(10797.24,7391.73) ; v1(10738.19,7066.93) 10738.19,7332.63
  Bottom Layer w19.68: 10683.07,6863.19 10738.17,6918.29 10738.17,6978.32 ; 10738.19,6978.35 v1(10738.19,7066.93) ; v1(10797.24,7391.73) 10812.57,7391.73 10857.41,7346.89 10894.56,7346.89 10920.83,7373.16 10920.83,7630.28 U11.6@11112.2,7821.65
NetS1_14: S1.14 U10.10 U12.10 | length 3338.2
  Top Layer w19.68: U10.10@10324.8,7421.65 10324.8,7273.62 v1(10442.91,7155.51)
  Bottom Layer w19.68: U10.10@10324.8,7421.65 10382.82,7421.65 10521.17,7283.31 11360.72,7283.31 11530.17,7452.76 12196.85,7452.76 12312.99,7568.9 12312.99,7620.08 U12.10@12214.57,7718.5 ; v1(10442.91,7155.51) 10648.47,7155.51 10692.21,7111.77 10756.76,7111.77 10791.43,7077.1 10791.43,6883.95 10724.41,6816.93
NetS1_15: S1.15 U10.9 U11.11 | length 2869
  Top Layer w19.68: U10.9@10324.8,7521.65 10671.26,7175.2 v1(10692.2,7175.2)
  Bottom Layer w19.68: U10.9@10324.8,7521.65 10533.46,7312.99 11348.43,7312.99 11584.65,7549.21 11584.65,7659.46 11427.17,7816.94 U11.11@11427.17,7821.65 ; 10690.6,6771.65 10692.73,6769.53 10753.78,6769.53 10821.12,6836.87 10821.12,7089.4 10769.06,7141.46 10725.94,7141.46 v1(10692.2,7175.2)
NetS1_16: S1.16 U12.6 | length 1983.1
  Top Layer w19.68: v1(10875.98,7155.51) 10875.98,7187.01 10888.78,7199.8 11566.93,7199.8 v1(11570.87,7203.74) ; v1(11569.88,7309.06) 11569.88,7475.84 11899.61,7805.56 U12.6@11899.61,7818.5
  Bottom Layer w19.68: 10759.02,6722.44 10850.8,6814.22 10850.8,7130.33 v1(10875.98,7155.51) v1@10875.98,7151.5 ; v1(11569.88,7309.06) 11561.02,7309.06 11570.87,7299.21 v1(11570.87,7203.74)
NetS1_17: S1.17 U11.3 | length 1742.3
  Top Layer w19.68: 10836.61,7116.14 10816.93,7135.83 10816.93,7253.94 10875.98,7312.99 v1(10875.98,7391.73) ; 10836.66,7116.14 10876.03,7076.77 v1(10895.67,7076.77)
  Bottom Layer w19.68: 10800,6683.86 ccw(c10800,6690.99) 10805.04,6685.95 10902.56,6783.46 10902.56,7069.88 v1(10895.67,7076.77) ; v1(10875.98,7391.73) 10875.98,8041.34 10956.3,8121.65 U11.3@11112.2,8121.65
NetS1_18: S1.18 U10.8 U12.14 | length 4754.9
  Top Layer w19.68: U10.8@10324.8,7621.65 10594.09,7352.36 10694.46,7352.36 10778.67,7436.57 10894.56,7436.57 11071.29,7259.84 12187.99,7259.84 12352.36,7424.21 12352.36,7980.71 U12.14@12214.57,8118.5
  Bottom Layer w19.68: U10.8@10324.8,7621.65 10297.95,7594.8 10268.91,7594.8 10187.01,7512.9 10187.01,7372.05 10335.12,7223.94 10910.35,7223.94 10940.51,7193.77 10940.51,7058.2 10940.49,6750.53 10874.02,6684.06